# EAGLE board team8_solar_tester (EAGLE 9.2.1)
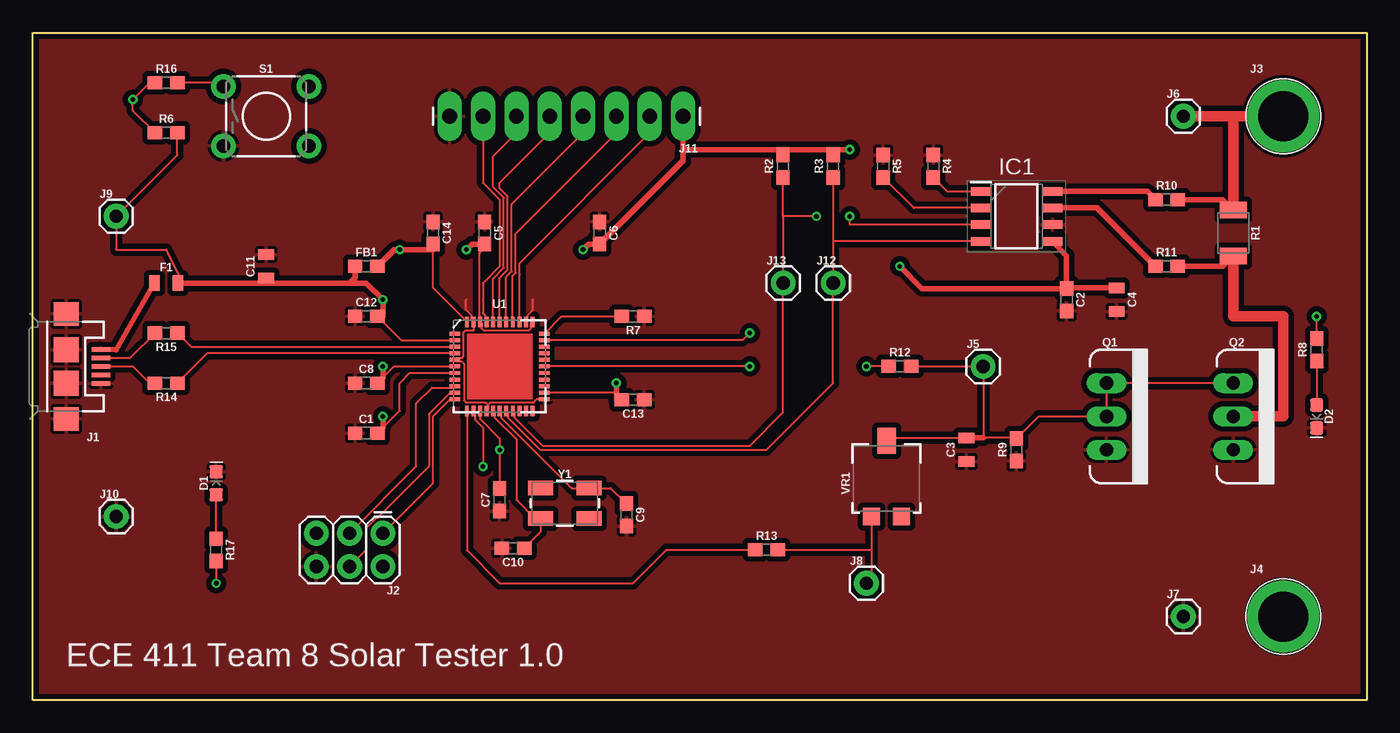
[diagram p0: board, top side]
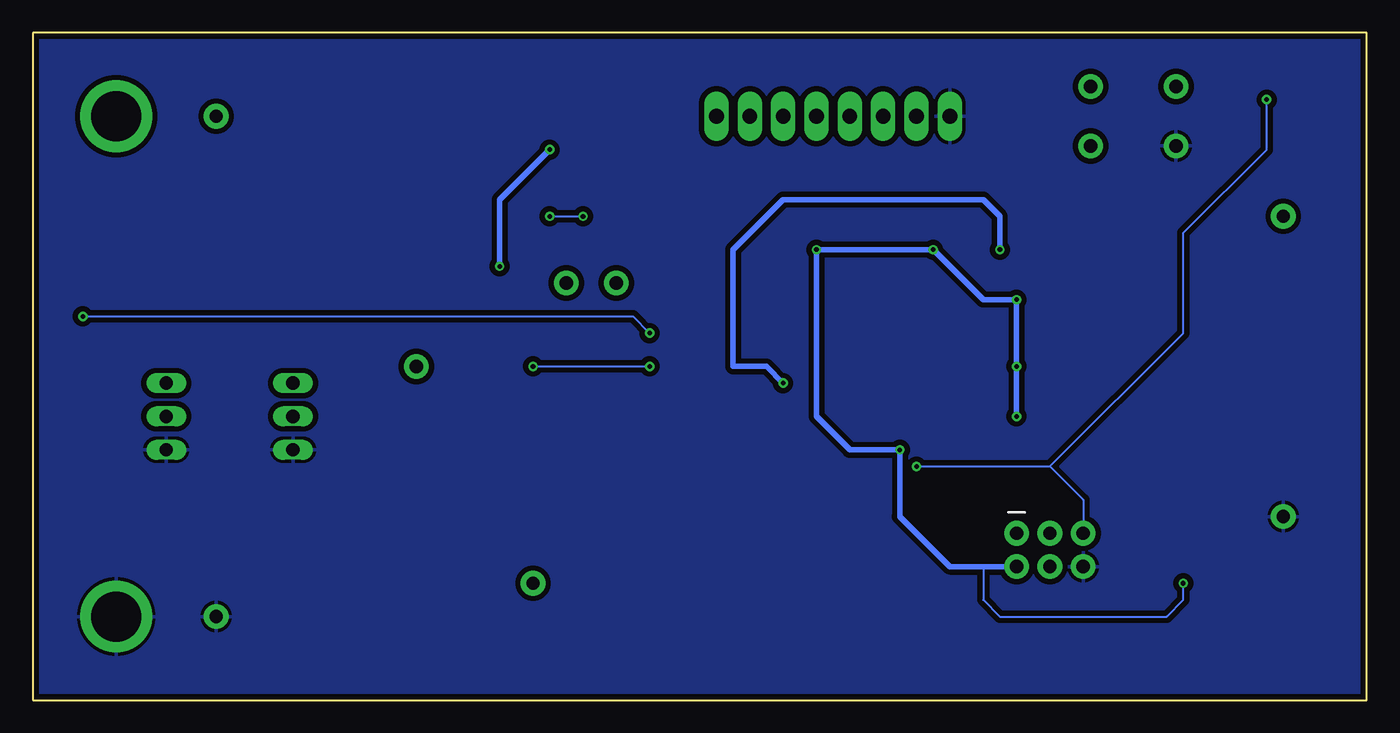
[diagram p1: board, bottom side, seen from below]

Size 101.6 x 50.8 mm. Coordinates in mm from the lower left corner, seen from the top.
Outline: 0,0 0,50.8 101.6,50.8 101.6,0 0,0
Copper layers (1*16): Top 0.0356mm / dielectric 1.5011mm / Bottom 0.0356mm
Design rules "LaenPCBOrder": minimum track width 6mil, minimum drill 13mil, track to track 6mil, track to pad 6mil, pad to pad 6mil, via to via 6mil, smd to smd 6mil, copper to edge 15mil, drill to drill 6mil, minimum pad ring 7mil, minimum via ring 7mil, stop-mask expansion 3mil, vias tented up to drill 0mil, thermal gap 10mil

## Footprints (pad centres in the part's own frame; a part is rotated, then mirrored left to right if it is on the bottom)
0603 = smd 1.1 x 1: 1 -0.85,0; 2 0.85,0
0805 = smd 0.8 x 1.2: 1 -0.9,0; 2 0.9,0
LED-0603 = smd 1 x 1: A -0.877,0; C 0.877,0
SOIC127P600X175-8N = smd 1.525 x 0.65: 1 -2.712,1.905; 2 -2.712,0.635; 3 -2.712,-0.635; 4 -2.712,-1.905; 5 2.712,-1.905; 6 2.712,-0.635; 7 2.712,0.635; 8 2.712,1.905
USB-MICROB = smd 1.4 x 0.35: D+ -2.65,0; D- -2.65,-0.65; GND -2.65,1.3; ID -2.65,0.65; VBUS -2.65,-1.3 | smd 1.9 x 1.8: MT1 0,-4; MT2 0,4 | smd 1.9 x 1.9: P$1 0,-1.27; P$2 0,1.27
2X3 = drill 1.016 pad 1.88: 1 0,0; 2 0,2.54; 3 2.54,0; 4 2.54,2.54; 5 5.08,0; 6 5.08,2.54
BANANA_CONN = drill 3.81 pad 5.461: P$1 0,0
1X01 = drill 1.016 pad 1.88: 1 0,0
1X08_LONGPADS = drill 1.118 pad 1.88 long: 1 0,0; 2 2.54,0; 3 5.08,0; 4 7.62,0; 5 10.16,0; 6 12.7,0; 7 15.24,0; 8 17.78,0
TO220V = drill 1.016 long: 1 -2.54,0; 2 0,0; 3 2.54,0
1210 = smd 1.27 x 2.06: 1 -1.755,0; 2 1.755,0
TACTILE_SWITCH_PTH_6.0MM = drill 1.016 pad 1.88: 1 -3.251,2.261; 2 3.251,2.261; 3 -3.251,-2.261; 4 3.251,-2.261
QFN-44 = smd 0.8 x 0.3: 1 -3.4,2.5; 2 -3.4,2; 3 -3.4,1.5; 4 -3.4,1; 5 -3.4,0.5; 6 -3.4,0; 7 -3.4,-0.5; 8 -3.4,-1; 9 -3.4,-1.5; 10 -3.4,-2; 11 -3.4,-2.5; 23 3.4,-2.5; 24 3.4,-2; 25 3.4,-1.5; 26 3.4,-1; 27 3.4,-0.5; 28 3.4,0; 29 3.4,0.5; 30 3.4,1; 31 3.4,1.5; 32 3.4,2; 33 3.4,2.5 | smd 0.3 x 0.8: 12 -2.5,-3.4; 13 -2,-3.4; 14 -1.5,-3.4; 15 -1,-3.4; 16 -0.5,-3.4; 17 0,-3.4; 18 0.5,-3.4; 19 1,-3.4; 20 1.5,-3.4; 21 2,-3.4; 22 2.5,-3.4; 34 2.5,3.4; 35 2,3.4; 36 1.5,3.4; 37 1,3.4; 38 0.5,3.4; 39 0,3.4; 40 -0.5,3.4; 41 -1,3.4; 42 -1.5,3.4; 43 -2,3.4; 44 -2.5,3.4
TRIMPOT-SMD-5MM = smd 1.3 x 1.3: A 1.15,-2.54; C -1.15,-2.54 | smd 1.402 x 2: B 0,3.239
CRYSTAL-SMD-5X3.2-4PAD = smd 1.9 x 1.1: 1 -1.85,-1.15; 2 1.85,-1.15; 3 1.85,1.15; 4 -1.85,1.15

## Placement (x,y rotation side)
C1  0.1uF  [0603]  25.4,20.32 0 top
C2  0.1uF  [0603]  78.74,30.48 270 top
C3  10uF  [0805]  71.12,19.05 90 top
C4  10uF  [0805]  82.55,30.48 270 top
C5  0.1uF  [0603]  34.42,35.56 270 top
C6  0.1uF  [0603]  43.18,35.56 270 top
C7  0.1uF  [0603]  35.56,15.24 90 top
C8  1.0uF  [0603]  25.4,24.13 0 top
C9  22pF  [0603]  45.21,14.1 270 top
C10  22pF  [0603]  36.58,11.56 180 top
C11  22uF  [0805]  17.78,33.02 90 top
C12  0.1uF  [0603]  25.4,29.21 0 top
C13  1.0uF  [0603]  45.72,22.86 180 top
C14  1.0uF  [0603]  30.48,35.56 270 top
D1  PWR blue  [LED-0603]  13.97,16.51 90 top
D2  LOAD PWM green  [LED-0603]  97.79,21.59 270 top
F1  PPTC_6V500MA  [0805]  10.16,31.75 0 top
FB1  30Ω/1.8A  [0603]  25.4,33.02 0 top
IC1  INA219AID  [SOIC127P600X175-8N]  74.93,36.83 0 top
J1  USB  [USB-MICROB]  2.54,25.4 180 top
J2  AVR_SPI_PROG_3X2PTH  [2X3]  26.67,12.7 180 top
J3  CELL+  [BANANA_CONN]  95.25,44.45 0 top
J4  CELL-  [BANANA_CONN]  95.25,6.35 0 top
J5  BIAS  [1X01]  72.39,25.4 0 top
J6  CELL+  [1X01]  87.63,44.45 0 top
J7  CELL-  [1X01]  87.63,6.35 0 top
J8  PWM  [1X01]  63.5,8.89 0 top
J9  5V  [1X01]  6.35,36.83 0 top
J10  GND  [1X01]  6.35,13.97 0 top
J11  EXP-I/O  [1X08_LONGPADS]  49.53,44.45 180 top
J12  SCL  [1X01]  60.96,31.75 0 top
J13  SDA  [1X01]  57.15,31.75 0 top
Q1  60V/32A/35mΩ  [TO220V]  81.79,21.59 270 top
Q2  60V/32A/35mΩ  [TO220V]  91.44,21.59 270 top
R1  0.1  [1210]  91.44,35.56 270 top
R2  4.7k  [0603]  57.15,40.64 90 top
R3  4.7k  [0603]  60.96,40.64 90 top
R4  10k  [0603]  68.58,40.64 270 top
R5  10k  [0603]  64.77,40.64 270 top
R6  10k  [0603]  10.16,43.18 0 top
R7  10k  [0603]  45.72,29.21 180 top
R8  1k  [0603]  97.79,26.67 90 top
R9  10k  [0603]  74.93,19.05 90 top
R10  10  [0603]  86.36,38.1 0 top
R11  10  [0603]  86.36,33.02 0 top
R12  0  [0603]  66.04,25.4 0 top
R13  0  [0603]  55.88,11.43 0 top
R14  22  [0603]  10.16,24.13 180 top
R15  22  [0603]  10.16,27.94 180 top
R16  1k  [0603]  10.16,46.99 0 top
R17  1k  [0603]  13.97,11.43 270 top
S1  MOMENTARY-SWITCH-SPST-PTH-6.0MM  [TACTILE_SWITCH_PTH_6.0MM]  17.78,44.45 0 top
U1  32U4  [QFN-44]  35.56,25.4 0 top
VR1  5k  [TRIMPOT-SMD-5MM]  65.02,16.51 0 top
Y1  16MHz  [CRYSTAL-SMD-5X3.2-4PAD]  40.51,14.99 0 top

## Library data of the parts
C1 C2 C5-C7 C12 = SparkFun-Capacitors; PROD_ID: CAP-08604
C3 C4 = SparkFun-Capacitors; PROD_ID: CAP-11330
C8 C13 C14 = SparkFun-Capacitors; PROD_ID: CAP-00868
C9 C10 = SparkFun-Capacitors; PROD_ID: CAP-07876
C11 = SparkFun-Capacitors; PROD_ID: CAP-08402
D1 = SparkFun-LED; PROD_ID: DIO-08575
D2 = SparkFun-LED; PROD_ID: DIO-00821
F1 = SparkFun-Fuses
FB1 = SparkFun-Coils; PROD_ID: NDUC-13805
IC1 = INA219AID; DESCRIPTION: Current/Power Monitor Zero-Drift I2C SO8 Texas Instruments INA219AID, Current Monitor Single Bidirectional 8-Pin SOIC; HEIGHT: 1.75mm; MANUFACTURER_NAME: Texas Instruments; MANUFACTURER_PART_NUMBER: INA219AID; MOUSER_PART_NUMBER: 595-INA219AID
J1 = SparkFun-Connectors; PROD_ID: CONN-09505; SF_ID: PRT-08533
J2-J13 = SparkFun-Connectors
Q1 Q2 = SparkFun-DiscreteSemi; PROD_ID: TRANS-10060
R1 = SparkFun-Resistors; PROD_ID: RES-12374
R2 R3 = SparkFun-Resistors; PROD_ID: RES-07857
R4-R7 R9 = SparkFun-Resistors; PROD_ID: RES-00824
R8 R16 R17 = SparkFun-Resistors; PROD_ID: RES-07856
R10 R11 = SparkFun-Resistors; PROD_ID: RES-12581
R12 R13 = SparkFun-Resistors; PROD_ID: RES-08609
R14 R15 = SparkFun-Resistors; PROD_ID: RES-08698
S1 = SparkFun-Switches; PROD_ID: SWCH-08441; SF_SKU: COM-00097
U1 = SparkFun-IC-Microcontroller; PROD_ID: IC-10828
VR1 = SparkFun-Resistors; PROD_ID: RES-11156
Y1 = SparkFun-Clocks; PROD_ID: XTAL-08218; SF_ID: COM-00094

## Nets
5V: C1.2 C2.1 C4.1 C5.2 C6.2 C7.2 C8.2 C11.1 C12.2 F1.2 FB1.1 IC1.5 J2.2 J9.1 J11.1 R2.2 R3.2 R6.2 R17.2 U1.2 U1.6 U1.7 U1.14 U1.34 U1.42
!RESET!: J2.5 R6.1 R16.1 U1.13
AVCC: C13.2 C14.2 FB1.2 U1.24 U1.44
BEFORE_FUSE: F1.1 J1.VBUS
GND: C1.1 C2.2 C3.1 C4.2 C5.1 C6.1 C7.1 C8.1 C9.2 C10.2 C11.2 C12.1 C13.1 C14.1 D1.C D2.C IC1.6 J1.GND J1.MT1 J1.MT2 J1.P$1 J1.P$2 J2.6 J4.P$1 J7.1 J10.1 J11.8 Q1.3 Q2.3 R4.1 R5.1 R7.1 R9.1 S1.3 U1.5 U1.15 U1.23 U1.35 U1.43
N$2: Q2.2 R1.2 R11.2
N$3: J3.P$1 J6.1 R1.1 R10.2
N$4: IC1.2 R5.2
N$5: IC1.1 R4.2
N$6: J11.7 U1.41
N$7: IC1.4 J12.1 R3.1 U1.18
N$8: IC1.8 R10.1
N$9: IC1.7 R11.1
N$10: R13.1 U1.12
N$11: J2.1 U1.11
N$12: J2.4 U1.10
N$13: J2.3 U1.9
N$14: R12.1 U1.28
N$15: J8.1 R13.2 VR1.C
N$17: J1.D+ R14.2
N$18: J1.D- R15.2
N$19: J11.6 U1.40
N$20: R15.1 U1.3
N$21: R14.1 U1.4
N$23: C10.1 U1.16 Y1.1
N$24: C9.1 U1.17 Y1.3
N$25: R16.2 S1.1
N$26: IC1.3 J13.1 R2.1 U1.19
N$27: C3.2 J5.1 Q1.1 Q1.2 Q2.1 R9.2 R12.2 VR1.B
N$28: J11.5 U1.39
N$29: J11.4 U1.38
N$30: J11.3 U1.37
N$31: J11.2 U1.36
N$32: R7.2 U1.33
N$33: R8.2 U1.32
N$34: D2.A R8.1
N$35: D1.A R17.1

## Tracks (layer width: path | path; a pad name or v marks a point on that pad's centre or on a via)
5V  (via drill 0.35)
  Top 0.152: U1.14 34.06,21.4 35.56,19.9 v35.56,19.05 C7.2 | C12.2 26.46,29 28.06,27.4 U1.2 | C8.2 26.46,24.34 27.52,25.4 U1.6 | C1.2 26.46,20.53 27.94,22.01 27.94,24.13 28.71,24.9 U1.7 | R6.2 11.01,41.49 J9.1 6.35,34.29 10.16,34.29 11.43,31.75 | C11.1 17.78,31.75 | U1.34 37.94,28.68 37.94,28.3 37.8,28.17 34.31,28.17 34.18,28.3 34.18,28.68 U1.42 34.06,29.24 33.98,29.32 33.98,33.98 C5.2 | R17.2 v13.97,8.89
  Top 0.406: F1.2 11.43,31.75 17.78,31.75 24.13,31.75 | 24.13,31.75 25.4,31.75 v26.67,30.48 26.67,29.21 26.46,29 | v26.67,25.4 26.67,24.55 26.46,24.34 | v26.67,21.59 26.67,20.74 26.46,20.53 | FB1.1 24.55,32.17 24.13,31.75 | v33.02,34.29 33.44,34.71 C5.2 | v41.91,34.29 42.33,34.71 C6.2 49.53,41.06 49.53,41.91 | 57.15,41.91 49.53,41.91 | IC1.5 78.74,33.83 C2.1 | C4.1 78.79,31.38 C2.1 | C2.1 67.73,31.33 v66.04,33.02 | J11.1 49.53,41.91 | R2.2 57.15,41.91 | v62.23,41.91 60.96,41.91 | 60.96,41.91 57.15,41.91 | R3.2 60.96,41.91
  Bottom 0.152: 29.21,10.16 29.21,7.62 27.94,6.35 15.24,6.35 13.97,7.62 v13.97,8.89
  Bottom 0.406: v26.67,21.59 v26.67,25.4 v26.67,30.48 29.21,30.48 v33.02,34.29 v41.91,34.29 41.91,21.59 39.37,19.05 v35.56,19.05 35.56,13.97 31.75,10.16 29.21,10.16 J2.2 | v62.23,41.91 66.04,38.1 v66.04,33.02
!RESET!  (via drill 0.35)
  Top 0.152: U1.13 33.68,21.88 33.68,21.35 34.29,20.74 v34.29,17.78 | R6.1 7.62,44.87 v7.62,45.72 8.89,46.99 R16.1
  Bottom 0.152: v34.29,17.78 24.13,17.78 | v7.62,45.72 7.62,41.91 13.97,35.56 13.97,27.94 24.13,17.78 | 24.13,17.78 21.59,15.24 J2.5
AVCC  (via drill 0.35)
  Top 0.152: U1.44 30.48,31.38 30.48,34.29 C14.2 | U1.24 44.33,23.4 C13.2 44.45,22.86
  Top 0.406: FB1.2 27.52,34.29 v27.94,34.29 30.48,34.29 | v44.45,24.13 44.45,22.86
  Bottom 0.406: v27.94,34.29 27.94,36.83 29.21,38.1 44.45,38.1 48.26,34.29 48.26,25.4 45.72,25.4 v44.45,24.13
BEFORE_FUSE
  Top 0.406: J1.VBUS 6.35,26.67 F1.1
GND
  Top 0.152: 33.02,30.48 33.02,29.71 33.44,29.3 33.44,28.92 U1.43 33.56,28.13 32.97,28.13 32.79,27.95 32.79,26.16 32.66,26.02 32.28,26.02 U1.5 32.28,25.78 32.66,25.78 32.83,25.6 32.83,22.8 32.97,22.67 34.51,22.67 34.68,22.5 | 34.68,22.5 34.81,22.63 38.11,22.63 38.38,22.9 U1.23 | 34.68,22.5 34.68,22.12 U1.15 | U1.35 37.68,28.92 37.68,29.3 38.1,29.71 38.1,30.48
  pour Top (isolate 0.406): 0,0 0,50.8 101.6,50.8 101.6,0
  pour Bottom (isolate 0.406): 0,0 0,50.8 101.6,50.8 101.6,0
N$2
  Top 0.406: R11.2 90.66,33.02 R1.2
  Top 0.813: R1.2 91.44,29.21 95.25,29.21 95.25,21.59 Q2.2
N$3
  Top 0.406: R10.2 90.66,38.1 R1.1
  Top 0.813: R1.1 91.44,44.45 | J6.1 91.44,44.45 | J3.P$1 91.44,44.45
N$4
  Top 0.152: IC1.2 67.09,37.47 R5.2
N$5
  Top 0.152: R4.2 69.64,38.73 IC1.1
N$6
  Top 0.152: J11.7 34.29,39.37 35.56,38.1 35.56,33.02 34.29,31.75 34.29,30.48 | U1.41 34.44,28.92 34.44,29.3 34.41,29.33 34.29,29.44 34.29,30.48 | 34.29,30.48
N$7
  Top 0.152: IC1.4 60.96,34.92 | 60.96,34.92 J12.1 60.96,24.13 55.88,19.05 38.64,19.05 36.18,21.5 36.18,21.88 U1.18 | R3.1 60.96,34.92
N$8
  Top 0.406: IC1.8 84.88,38.73 R10.1
N$9
  Top 0.406: IC1.7 81.06,37.47 R11.1
N$10
  Top 0.152: U1.12 33.06,11.39 35.56,8.89 45.72,8.89 48.26,11.43 R13.1
N$11
  Top 0.152: J2.1 30.48,16.51 30.48,21.59 31.79,22.9 U1.11
N$12
  Top 0.152: U1.10 32.04,23.28 31.66,23.28 30.18,21.79 30.18,17.78 26.26,13.87 26.19,13.87 25.4,13.08 25.4,11.43 J2.4
N$13
  Top 0.152: J2.3 29.21,17.78 29.21,22.59 30.39,23.78 32.04,23.78 U1.9
N$14  (via drill 0.35)
  Top 0.152: R12.1 v63.5,25.4 | v54.61,25.4 U1.28
  Bottom 0.152: v63.5,25.4 v54.61,25.4
N$15
  Top 0.152: VR1.C 63.87,11.43 | 63.87,11.43 63.87,9.26 | R13.2 63.87,11.43
  Top 0.406: 63.87,9.26 J8.1
N$17
  Top 0.152: J1.D+ 7.62,25.4 8.89,24.13 R14.2
N$18
  Top 0.152: J1.D- 7.42,26.05 R15.2
N$19
  Top 0.152: J11.6 36.83,43.18 35.06,41.41 35.06,39.03 35.87,38.23 35.87,32.89 35.06,32.09 U1.40
N$20
  Top 0.152: R15.1 12.05,26.9 U1.3
N$21
  Top 0.152: U1.4 13.28,26.4 R14.1
N$23
  Top 0.152: U1.16 35.18,21.88 35.18,21.5 36.83,19.86 36.83,15.24 38.23,13.84 Y1.1 38.66,12.79 C10.1
N$24
  Top 0.152: U1.17 35.68,21.88 35.68,21.5 41.05,16.14 Y1.3 44.02,16.14 C9.1
N$25
  Top 0.152: S1.1 14.25,46.99 R16.2
N$26  (via drill 0.35)
  Top 0.152: IC1.3 62.23,36.2 v62.23,36.83 | v59.69,36.83 57.15,36.83 | 57.15,36.83 R2.1 | 57.15,36.83 J13.1 57.15,21.89 54.61,19.36 38.83,19.36 36.68,21.5 36.68,21.88 U1.19
  Bottom 0.152: v62.23,36.83 v59.69,36.83
N$27
  Top 0.152: 65.22,19.95 C3.2 | 74.88,19.95 72.39,19.95 J5.1 R12.2 | Q2.1 Q1.1 Q1.2 76.62,21.59 R9.2
  Top 0.406: VR1.B 65.22,19.95 | R9.2 74.88,19.95 | 72.39,19.95 C3.2
N$28
  Top 0.152: J11.5 39.37,43.18 35.56,39.37 35.56,38.96 36.17,38.35 36.17,32.77 35.56,32.16 U1.39
N$29
  Top 0.152: J11.4 41.91,43.18 36.47,37.74 36.47,32.64 36.06,32.23 U1.38
N$30
  Top 0.152: J11.3 44.45,43.18 36.78,35.51 36.78,32.52 36.56,32.3 U1.37
N$31
  Top 0.152: U1.36 37.06,32.37 37.08,32.39 37.08,33.27 46.99,43.18 J11.2
N$32
  Top 0.152: U1.33 40.27,29.21 R7.2
N$33  (via drill 0.35)
  Top 0.152: R8.2 v97.79,29.21 | v54.61,27.94 54.07,27.4 U1.32
  Bottom 0.152: v97.79,29.21 55.88,29.21 v54.61,27.94
N$34
  Top 0.152: R8.1 D2.A
N$35
  Top 0.152: R17.1 D1.A

## Text on the board
tPlace: ECE 411 Team 8 Solar Tester 1.0